# Altium PCB AD.PcbDoc
Units mm, origin at the board's own origin, x right, y up, seen from the top; angles counter-clockwise.
Board outline 60 x 30 mm, 2 copper layers (Top Layer, Bottom Layer), stack 0.325 mm thick; 34 components, 22 nets, 127 pads, 16 vias.
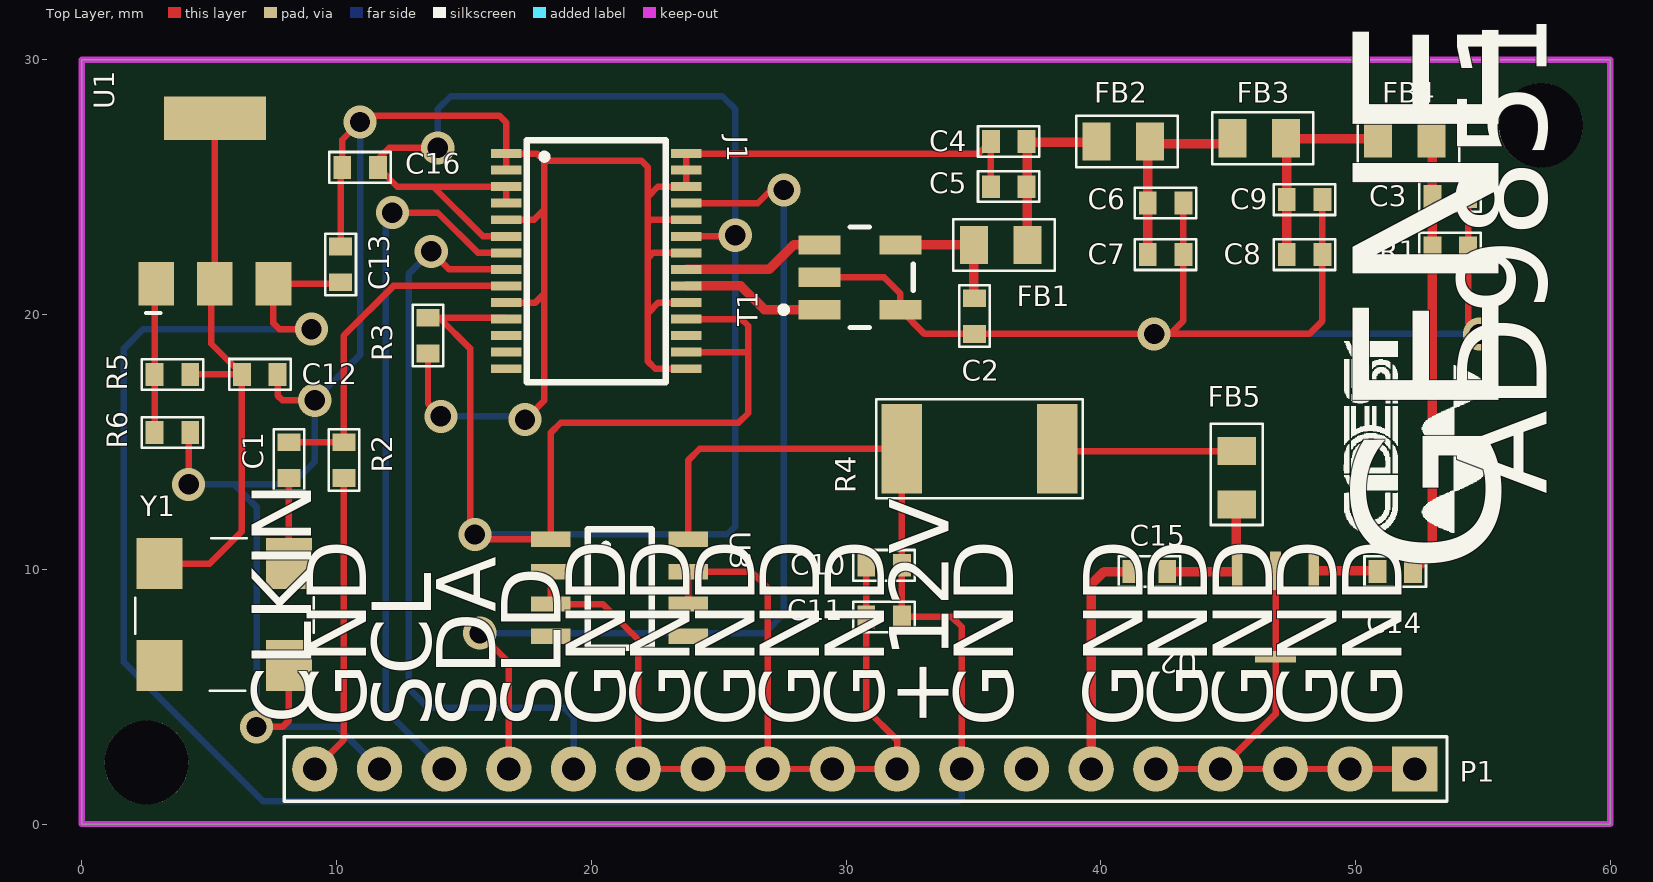
[diagram p0: Top Layer view]
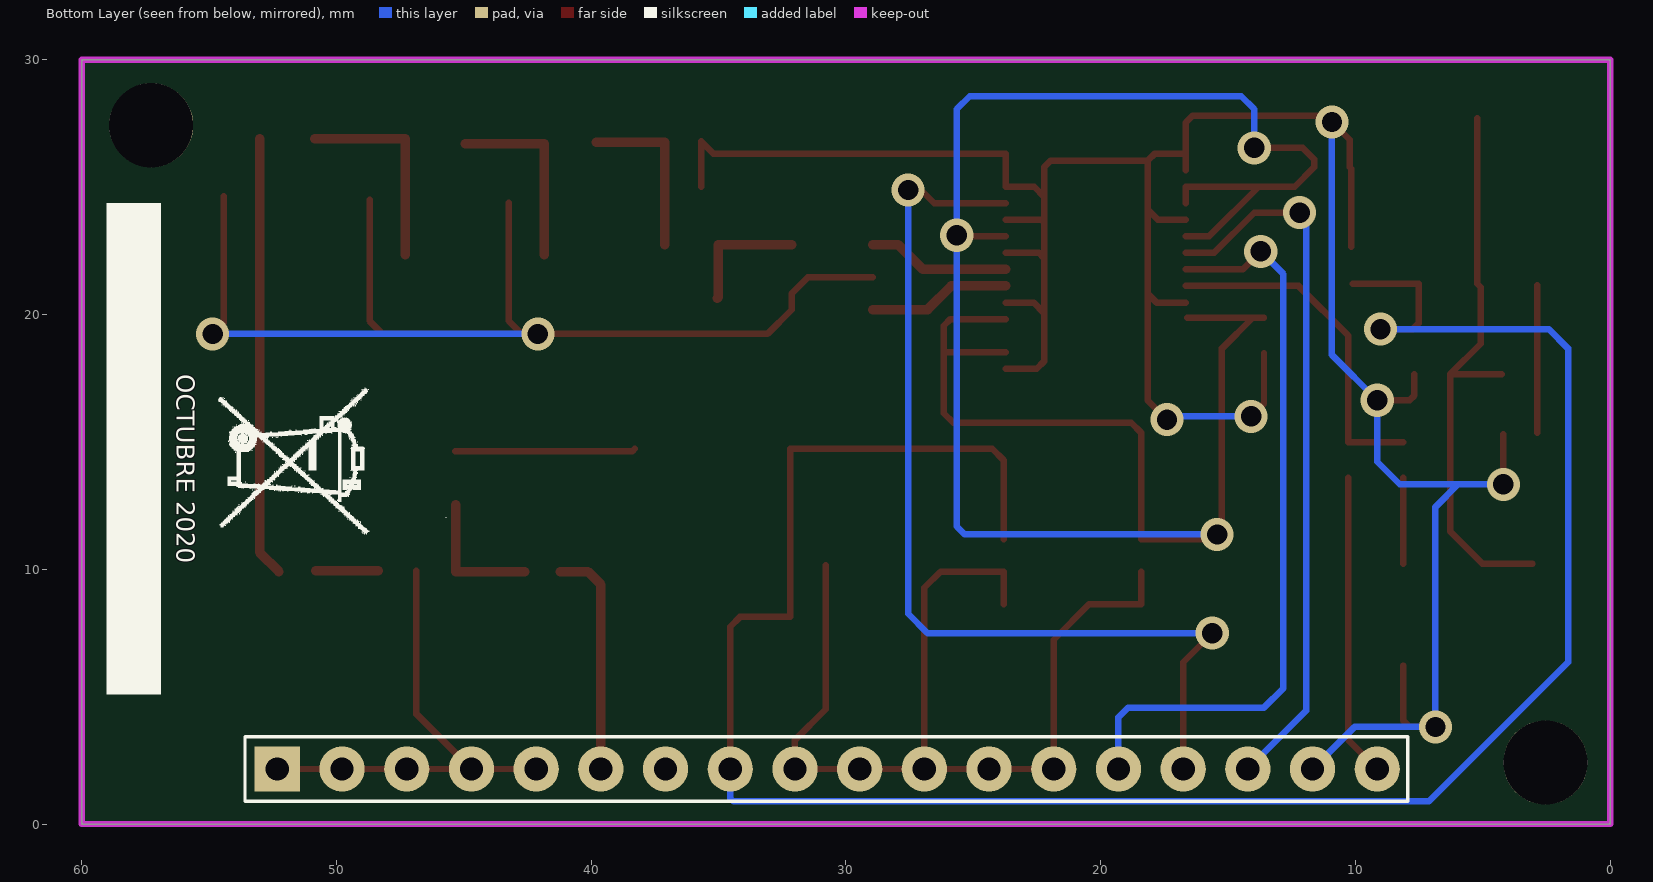
[diagram p1: Bottom Layer view, seen from below]

## Layer stack, top to bottom
Top Solder: solder mask 0.0102, Solder Resist, Dk 3.5
Top Layer: signal copper 0.0356
Dielectric 1: core 0.254, FR-4, Dk 4.2
Bottom Layer: signal copper 0.0356
Bottom Solder: solder mask 0.0102, Solder Resist, Dk 3.5

## Board outline
0,0 60,0 60,30 0,30

## Design rules (kind name [scope] priority, off if disabled: settings)
Clearance [All] p1: gap=0.254
PolygonConnect [All] p1: connectstyle=Relief reliefconductorwidth=0.254 reliefentries=4 polygonreliefangle="90 Angle" airgapwidth=0.254
RoomDefinition ad9851 [InComponentClass('ad9851')] p1: confinementstyle=ConfineIn formatcopy=TRUE lockcomponents=FALSE outline -114.808,-47.752 -64.008,-47.752 -64.008,-22.352 -114.808,-22.352
RoutingVias [All] p1: holewidth=0.711 width=1.27 viastyle="Through Hole" minholewidth=0.711 minwidth=1.27 maxholewidth=0.711 maxwidth=1.27
SolderMaskExpansion [All] p1: expansion=0.102
Width [InNet('NetJ1_20','NetJ1_21','NetC2_1','NetC4_1','NetC6_1','NetC8_1','NetC3_1','NetC14_2','NetC15_1','NetC15_2')] p1: maxlimit=0.373 minlimit=0.164 preferedwidth=0.373 toplayer_minwidth=0.373 bottomlayer_maxwidth=0.164 bottomlayer_prefwidth=0.164 impedancedriven=TRUE minimp=50.000000 maximp=50.000000 favimp=50.000000
30 further rules are at their usual default settings.

## Components (designator, comment, footprint, x,y, rotation, side; value= is the part's Value field where it differs from the comment)
C1 "10nF, 10V" C0603 8.128,14.289 r90 top
C2 "18pF, 50V" C0603 35.052,19.939 r270 top
C3 "18pF, 50V" C0603 53.721,24.638 r0 top
C4 "82pF, 50V" C0603 36.387,26.797 r180 top
C5 "NBC" C0603 36.387,25.019 r180 top
C6 "120pF, 50V" C0603 42.545,24.384 r0 top
C7 "NBC" C0603 42.545,22.352 r0 top
C8 "82pF, 50V" C0603 48.006,22.352 r0 top
C9 "NBC" C0603 48.006,24.511 r0 top
C10 "100nF, 16V" C0603 31.496,10.16 r0 top
C11 "10uF, 16V" C0603 31.496,8.128 r180 top
C12 "1uF, 25V" C0603 6.985,17.653 r180 top
C13 "10uF, 16V" C0603 10.16,21.971 r90 top
C14 "470nF, 16V" C0603 51.562,9.906 r180 top
C15 "470nF, 16V" C0603 41.91,9.906 r180 top
C16 "1uF, 25V" C0603 10.922,25.781 r180 top
FB1 "150nH" "SIMID 0805" 36.068,22.733 r0 top
FB2 "330nH" "SIMID 0805" 40.894,26.797 r0 top
FB3 "330nH" "SIMID 0805" 46.228,26.924 r0 top
FB4 "150nH" "SIMID 0805" 51.943,26.924 r0 top
FB5 "NBI" "SIMID 0805" 45.339,13.589 r90 top
J1 "AD9851" TSSOP28 20.193,22.098 r270 top
P1 "HEADER1X18" HEAD9-90 52.324,2.159 r180 top
R1 "NB" RESC0603 53.721,22.606 r0 top
R2 "NB" RESC0603 10.287,14.289 r90 top
R3 "6K8, 100mW" RESC0603 13.589,19.177 r90 top
R4 "120R0, 2W" RESC2512 37.592,14.732 r180 top
R5 "240R0, 100mW" RESC0603 3.556,17.653 r0 top
R6 "390R0, 100mW" RESC0603 3.553,15.367 r180 top
T1 "Transformer" Mini-Circuits_0_MFG 28.956,20.193 r90 top
U1 "LM317EMP 3V3" SOT-223-4 2.921,21.209 r0 top
U2 "GALI-4+" SOT-89-3 46.863,8.255 r180 top
U3 "Voltage Regulator 5V" SOIC8 18.415,11.176 r270 top
Y1 "OSCILATOR" OScilator 3.048,6.223 r0 top

## Footprints (in the part's own frame and the unit in brackets; to place one, negate y for a bottom-side part, rotate by r counter-clockwise, add the part's x,y. Pads: shape width x height; smd on the part's side, far side on the other; paste and mask are expansions set on the pad)
C0603 [mm]
  rect 0.7x0.9 smd: 1(-0.7,0) 2(0.7,0)
  silkscreen extent -1.21,-0.6 1.21,0.6, body extent -0.75,-0.42 0.85,0.38, height 0.8
HEAD9-90 [mil] "HEAD15-NOSS"
  rect 70x70 hole 36: 1(0,0)
  round 70 hole 36: 2(100,0) 3(200,0) 4(300,0) 5(400,0) 6(500,0) 7(600,0) 8(700,0) 9(800,0) 10(900,0) 11(1000,0) 12(1100,0) 13(1200,0) 14(1300,0) 15(1400,0) 16(1500,0) 17(1600,0) 18(1700,0)
  silkscreen extent -50,-50 1747,50, body extent -45,-50 1735,347, height 242
Mini-Circuits_0_MFG [mil]
  rect 30x65 smd paste+0 mask+0: 1(0,0) 2(50,0) 3(100,0) 4(100,-125) 6(0,-125)
  silkscreen extent -27,-145 128,60, body extent -31,-161 131,36, height 10
OScilator [mm]
  rect 1.8x2 smd mask+0.102: 1(0,0)
  rect 1.8x2 smd: 2(5.08,0) 3(5.08,4) 4(0,4)
  silkscreen extent -0.95,-1 6.05,5, body extent -0.9,-0.48 6.1,4.54, height 1.52
RESC0603 [mm]
  rect 0.7x0.9 smd: 1(-0.7,0) 2(0.7,0)
  silkscreen extent -1.21,-0.6 1.21,0.6, body extent -0.85,-0.4 0.85,0.4, height 0.56
RESC2512 [mm]
  rect 1.6x3.5 smd: 1(-0.7,0) 2(5.4,0)
  silkscreen extent -1.7,-1.95 6.4,1.95, body extent -0.9,-1.63 5.45,1.63, height 0.58
"SIMID 0805" [mm]
  rect 1.1x1.5 smd: 1(-1.05,0) 2(1.05,0)
  silkscreen extent -1.85,-1.02 2.12,1.02, body extent -1.14,-0.96 1.14,0.76, height 1.51
SOIC8 [mm]
  rect 0.6x1.55 smd: 1(0,0) 2(1.27,0) 3(2.54,0) 4(3.81,0) 5(3.81,5.4) 6(2.54,5.4) 7(1.27,5.4) 8(0,5.4)
  silkscreen extent -0.4,1.45 4.25,3.95, body extent -0.58,-0.36 4.43,5.86, height 1.75
SOT-89-3 [mm]
  rect 0.42x1.5 smd: 1(-1.5,-1.687) 2(0,-1.687) 3(1.5,-1.687)
  rect 1.6x0.45 smd: 4(0,1.687)
  body extent -2.25,-2.31 2.25,1.94, height 1.54
SOT-223-4 [mm]
  rect 1.4x1.7 smd: 1(0,0) 2(2.3,0) 3(4.6,0)
  rect 4x1.7 smd: 4(2.3,6.5)
  silkscreen extent -0.4,-1.15 0.16,-1.15, body extent -0.95,-0.38 5.55,6.62, height 1.64
TSSOP28 [mm]
  rect 0.35x1.2 smd: 1(-4.225,-3.535) 2(-3.575,-3.535) 3(-2.925,-3.535) 4(-2.275,-3.535) 5(-1.625,-3.535) 6(-0.975,-3.535) 7(-0.325,-3.535) 8(0.325,-3.535) 9(0.975,-3.535) 10(1.625,-3.535) 11(2.275,-3.535) 12(2.925,-3.535) 13(3.575,-3.535) 14(4.225,-3.535) 15(4.225,3.535) 16(3.575,3.535) 17(2.925,3.535) 18(2.275,3.535) 19(1.625,3.535) 20(0.975,3.535) 21(0.325,3.535) 22(-0.325,3.535) 23(-0.975,3.535) 24(-1.625,3.535) 25(-2.275,3.535) 26(-2.925,3.535) 27(-3.575,3.535) 28(-4.225,3.535)
  silkscreen extent -4.75,-2.74 4.75,2.74, body extent -5.17,-3.86 5.16,3.89, height 2.15

## Part data
C1 C2 C3 C4 C5 C6 C7 C8 C9 C10 C11 C12 C13 C14 C15 C16: "Cap_Cer"
FB1 FB2 FB3 FB4 FB5: "Inductor"
J1: "DDS/DAC Synthesizer"
P1: "HEADER"
R1 R2 R3 R4 R5 R6: "Resistor"
T1: "Signal Transformers"
U1 U3: "Voltage Regulator"
U2: "AMPLIFIER"
Y1: "Crystal Oscillator"

## Free pads (board coordinates)
  round 3.3 hole 3.3: N(2.54,2.413) N(57.277,27.432)

## Via types
v1: diameter 1.3, hole 0.8, Top Layer to Bottom Layer, 16 vias

## Nets (pads, with @x,y where several pads share a name; then routed paths per layer and width w, separated by ;. In a path a pad name is that pad's centre, name@x,y a point inside that pad or via, vN(x,y) a via of type N, cw(c..) or ccw(c..) an arc to the next point about the centre after c; other vN are vias at no path point)
3V3: C12.2 R5.2 U1.2 U1.4 Y1.4 | length 22.6
  Top Layer w0.254: Y1.4 5.016,10.223 6.285,11.492 C12.2 ; R5.2 C12.2 ; U1.4 U1.2 5.08,21.068 5.08,18.858 C12.2
5VCC: C16.1 J1.3 J1.4 J1.6 J1.11 J1.16 J1.18 J1.23 R3.2 U3.1 | length 90.7
  Top Layer w0.254: R3.2 R3.2@14.032,19.877 ; v1(13.97,26.543) 12.065,26.543 11.622,26.1 C16.1 12.38,25.023 13.795,25.023 ; J1.11@16.604,19.877 R3.2@14.032,19.877 ; J1.6 15.745,23.073 13.795,25.023 ; J1.4 J1.3 13.795,25.023 ; J1.16 26.143,18.523 26.162,18.542 ; J1.18 25.897,19.823 26.162,19.558 26.162,18.542 ; J1.23 25.613,23.073 v1(25.654,23.114) ; R3.2@14.032,19.877 15.24,18.669 15.24,11.557 v1(15.43,11.367) 15.621,11.176 U3.1 18.415,15.367 18.796,15.748 25.781,15.748 26.162,16.129 26.162,18.542
  Bottom Layer w0.254: v1(13.97,26.543) 13.97,28.067 14.478,28.575 25.146,28.575 25.654,28.067 v1(25.654,23.114) 25.654,11.684 25.336,11.367 v1(15.43,11.367)
12V: C10.2 C11.1 C13.1 P1.8 R4.2 U1.3 U3.8 | length 88.4
  Top Layer w0.254: v1(9.017,19.431) 7.747,19.431 7.521,19.657 U1.3 C13.1@10.098,21.209 ; U3.8 23.815,14.29 24.257,14.732 R4.2 ; R4.2@32.196,14.728 C10.2 C11.1 34.163,8.128 34.544,7.747 P1.8
  Bottom Layer w0.254: v1(9.017,19.431) 2.413,19.431 1.651,18.669 1.651,6.35 7.112,0.889 34.417,0.889 34.544,1.016 P1.8
GND: C2.2 C3.2 C4.2 C5.2 C6.2 C7.2 C8.2 C9.2 C10.1 C11.2 C12.1 C13.2 C16.2 J1.1 J1.2 J1.5 J1.10 J1.15 J1.19 J1.22 J1.24 J1.26 J1.27 J1.28 P1.1 P1.2 P1.3 P1.4 P1.5 P1.7 P1.9 P1.10 P1.11 P1.12 P1.13 P1.17 R1.2 R3.1 R6.1 T1.2 T1.6 U2.2 U2.4 U3.2 U3.3 U3.6 U3.7 Y1.2 | length 223.3
  Top Layer w0.254: v1(4.191,13.335) R6.1@4.191,15.305 ; v1(6.858,3.81) 7.874,3.81 8.128,4.064 Y1.2 ; C12.1 7.685,16.826 7.874,16.637 v1(9.144,16.637) ; C13.2 C16.2@10.16,25.719 ; C16.2 10.222,26.859 v1(10.922,27.559) 11.176,27.813 16.383,27.813 16.658,27.538 J1.1 ; R3.1 13.589,16.51 v1(14.097,16.002) ; J1.10 17.806,20.473 18.161,20.828 ; J1.5 17.754,23.723 18.161,24.13 ; J1.2 J1.1 ; v1(17.399,15.875) 18.161,16.637 18.161,20.828 ; U3.2 U3.3 20.447,8.636 21.844,7.239 P1.13 P1.12 P1.11 ; J1.15 22.513,17.873 22.225,18.161 22.225,20.066 ; J1.19 22.632,20.473 22.225,20.066 ; J1.22 22.423,22.423 22.225,22.225 ; J1.24 22.326,23.723 22.225,23.622 ; U3.6 U3.7 26.289,9.906 26.924,9.271 P1.11 ; T1.2 31.496,21.463 32.131,20.828 T1.6 33.085,19.239 C2.2 v1(42.099,19.239) v1@42.734,19.239 ; C10.1 C11.2 30.796,4.51 32.004,3.302 P1.9 P1.10 P1.11 ; C5.2 C4.2 35.213,26.323 J1.28 J1.27 J1.26 22.61,25.023 22.225,24.638 ; P1.5 P1.4 ; C6.2 C7.2 43.245,19.75 v1@42.734,19.239 ; U2.2 U2.4 46.863,4.318 P1.4 ; C9.2 C8.2 48.706,19.75 48.195,19.239 v1@42.734,19.239 ; P1.1 P1.2 P1.3 P1.4 ; C3.2 R1.2 54.421,19.682 v1(54.864,19.239) ; J1.1 17.873,26.323 18.161,26.035 ; 18.161,20.828 18.161,24.13 ; 18.161,24.13 18.161,26.035 ; 18.161,26.035 21.971,26.035 22.225,25.781 22.225,24.638 ; 22.225,20.066 22.225,22.225 ; 22.225,22.225 22.225,23.622 ; 22.225,23.622 22.225,24.638
  Bottom Layer w0.254: v1(10.922,27.559) 10.922,18.415 v1(9.144,16.637) 9.144,14.224 8.255,13.335 v1(4.191,13.335) 5.969,13.335 6.858,12.446 v1(6.858,3.81) 10.033,3.81 P1.17 ; v1(14.097,16.002) 17.272,16.002 v1(17.399,15.875) ; v1(42.099,19.239) v1(54.864,19.239)
NetC1_1: C1.1 Y1.3 | length 3.4
  Top Layer w0.254: Y1.3 C1.1
NetC1_2: C1.2 J1.9 R2.2 | length 13.5
  Top Layer w0.254: C1.2 R2.2 10.287,19.177 12.233,21.123 J1.9
NetC2_1: C2.1 FB1.1 T1.4 | length 5
  Top Layer w0.373: T1.4 FB1.1 35.018,20.673 C2.1
NetC3_1: C3.1 C14.1 FB4.2 R1.1 | length 17.3
  Top Layer w0.373: C14.1 53.021,10.665 R1.1 C3.1 FB4.2@53.021,26.896
NetC4_1: C4.1 C5.1 FB1.2 FB2.1 | length 6.7
  Top Layer w0.373: FB1.2 37.118,26.766 FB2.1@39.813,26.766
NetC6_1: C6.1 C7.1 FB2.2 FB3.1 | length 7.5
  Top Layer w0.373: C7.1 C6.1 41.845,26.698 FB3.1@44.952,26.698
NetC8_1: C8.1 C9.1 FB3.2 FB4.1 | length 8.1
  Top Layer w0.373: C8.1 C9.1 47.306,26.896 FB4.1@50.865,26.896
NetC14_2: C14.2 U2.1 | length 2.5
  Top Layer w0.373: U2.1 C14.2@50.825,9.942
NetC15_1: C15.1 FB5.1 U2.3 | length 5.3
  Top Layer w0.373: C15.1 45.327,9.906 FB5.1@45.327,12.527
NetC15_2: C15.2 P1.6 | length 9
  Top Layer w0.373: P1.6 39.624,9.398 40.132,9.906 C15.2
NetFB5_2: FB5.2 R4.1 | length 7.1
  Top Layer w0.254: R4.1 38.385,14.639 FB5.2
NetJ1_7: J1.7 P1.16 | length 28
  Top Layer w0.254: v1(12.192,24.003) 13.97,24.003 15.55,22.423 J1.7
  Bottom Layer w0.254: v1(12.192,24.003) 11.938,23.749 11.938,4.445 P1.16
NetJ1_8: J1.8 P1.14 | length 29.7
  Top Layer w0.254: v1(13.716,22.479) 14.422,21.773 J1.8
  Bottom Layer w0.254: v1(13.716,22.479) 12.827,21.59 12.827,5.334 13.589,4.572 18.923,4.572 19.304,4.191 P1.14
NetJ1_20: J1.20 T1.1 | length 5.6
  Top Layer w0.373: J1.20 25.867,21.123 26.797,20.193 T1.1
NetJ1_21: J1.21 T1.3 | length 5.6
  Top Layer w0.373: J1.21 26.98,21.773 27.94,22.733 T1.3
NetJ1_25: J1.25 P1.15 | length 38.8
  Top Layer w0.254: v1(15.621,7.493) 16.764,6.35 P1.15 ; J1.25 26.532,24.373 27.178,25.019 27.305,24.892 v1(27.559,24.892)
  Bottom Layer w0.254: v1(15.621,7.493) 26.797,7.493 27.559,8.255 v1(27.559,24.892)
NetP1_18: P1.18 R2.1 | length 11.9
  Top Layer w0.254: P1.18 10.287,3.302 R2.1
NetR5_1: R5.1 R6.2 U1.1 | length 5.8
  Top Layer w0.254: R6.2 2.853,17.65 R5.1 U1.1@2.856,21.144
pads on no net: J1.12 J1.13 J1.14 J1.17 U3.4 U3.5 Y1.1

## Polygon pours and split planes (outlines as drawn)
GND on Bottom Layer "TO_GND" (solid, shelved, pour order 0): 0,0 0,30 60,30 60,0

## Keep-outs
Keep-Out Layer:
  the board outline again, w0.254

## Silkscreen, mask and mechanical layers (free items; w line width, h text height)
Top Overlay:
  drawing of 915 lines, arcs and shapes, not listed
  text "AD9851" at 58.674,12.954 h6 r90
  text "GENERADOR" at 57.531,9.779 h10 r90
  text "CLKIN" at 9.779,3.937 h4 r90
  text "GND" at 11.938,3.81 h4 r90
  text "SCL" at 14.478,3.81 h4 r90
  text "SDA" at 17.018,3.81 h4 r90
  text "SLD" at 19.558,3.81 h4 r90
  text "GND" at 22.098,3.81 h4 r90
  text "GND" at 24.638,3.81 h4 r90
  text "GND" at 27.178,3.81 h4 r90
  text "GND" at 29.718,3.81 h4 r90
  text "GND" at 32.258,3.81 h4 r90
  text "+12V" at 34.798,3.81 h4 r90
  text "GND" at 37.338,3.81 h4 r90
  text "GND" at 42.418,3.81 h4 r90
  text "GND" at 44.958,3.81 h4 r90
  text "GND" at 47.498,3.81 h4 r90
  text "GND" at 50.038,3.81 h4 r90
  text "GND" at 52.578,3.81 h4 r90
Bottom Overlay:
  drawing of 1101 lines, arcs and shapes, not listed
  text "OCTUBRE 2020" at 56.515,17.653 h1.2 r90

## Dimensions
60,30 to 0,30 on Mechanical 1
0,0 to 0,30 on Mechanical 1